# Altium PCB CH32V103C-R1-1v1.PcbDoc
Units mil, origin at the board's own origin, x right, y up, seen from the top; angles counter-clockwise.
Board outline 3733 x 2651 mil, 2 copper layers (Top Layer, Bottom Layer); 65 components, 71 nets, 311 pads, 215 vias.
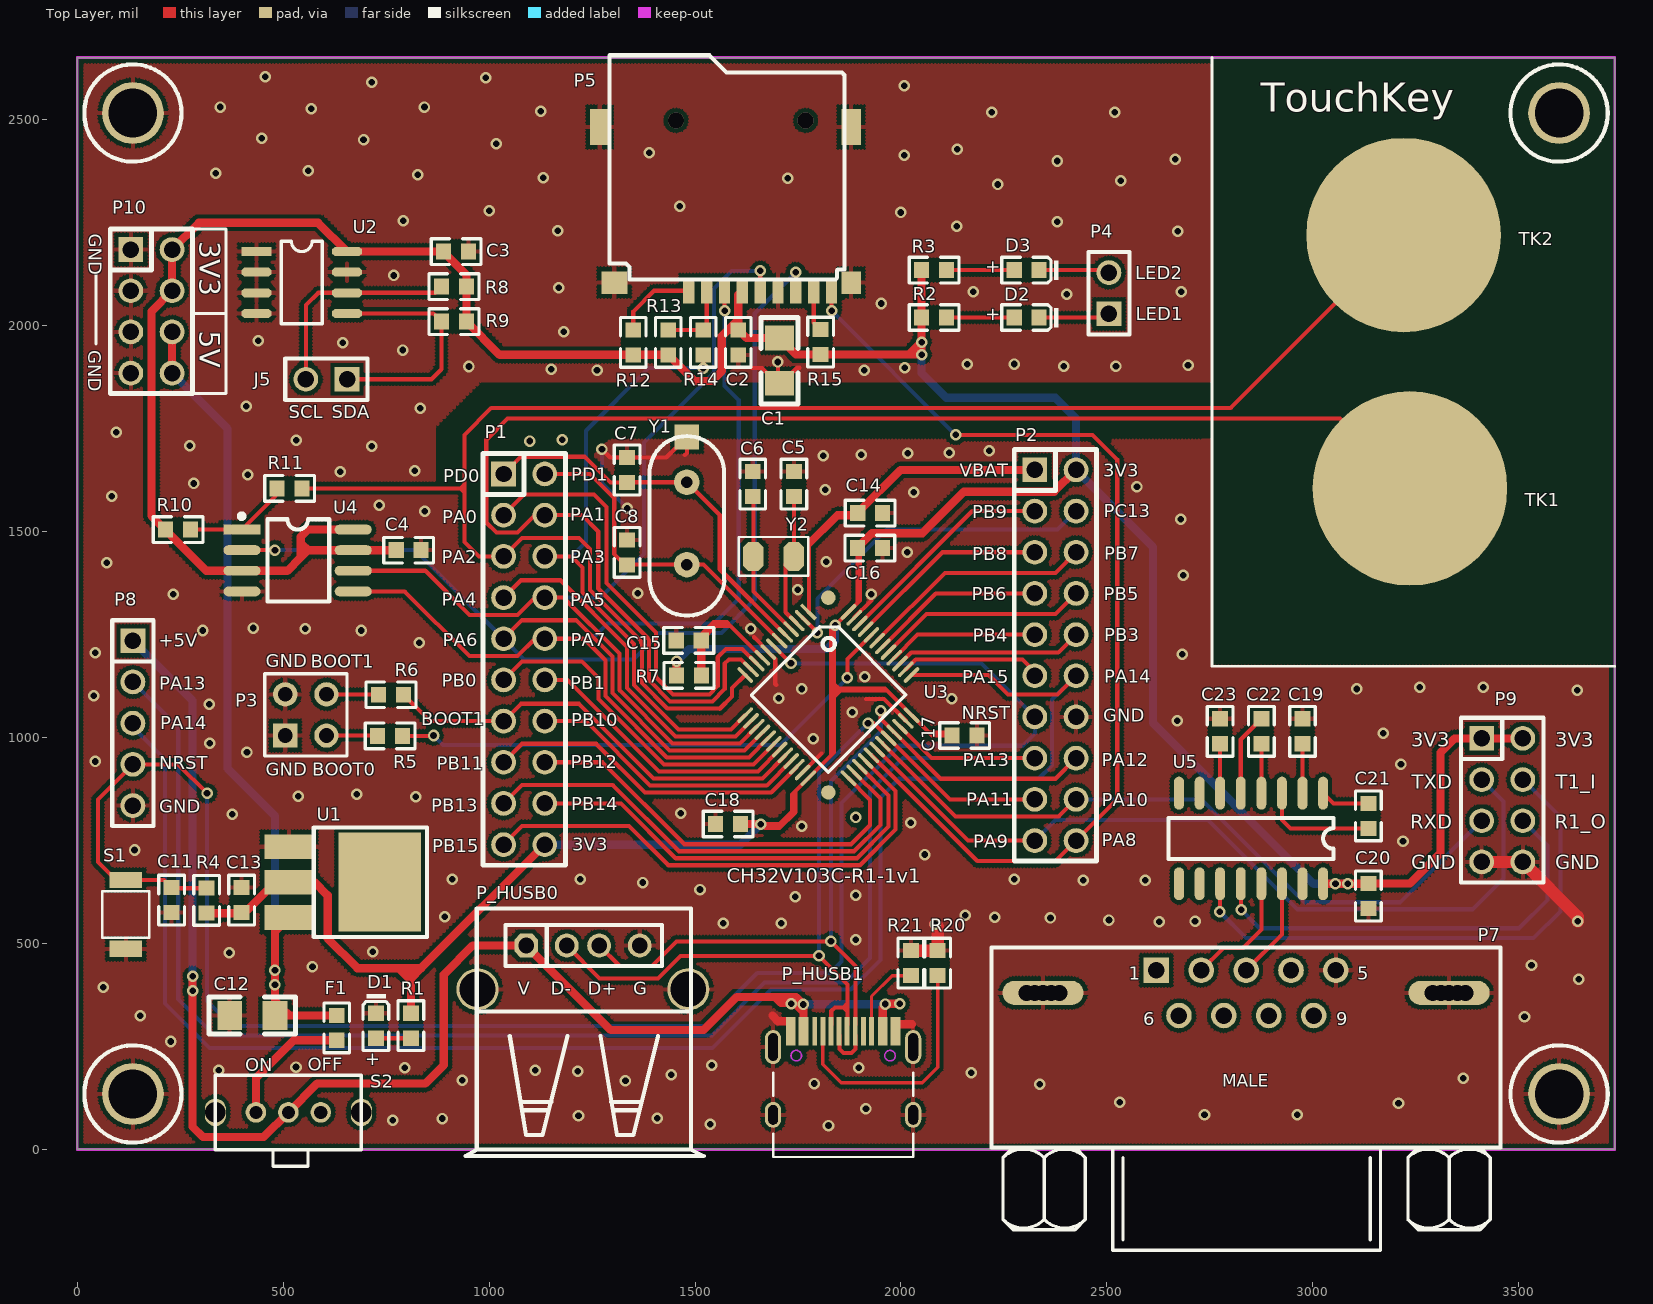
[diagram p0: Top Layer view]
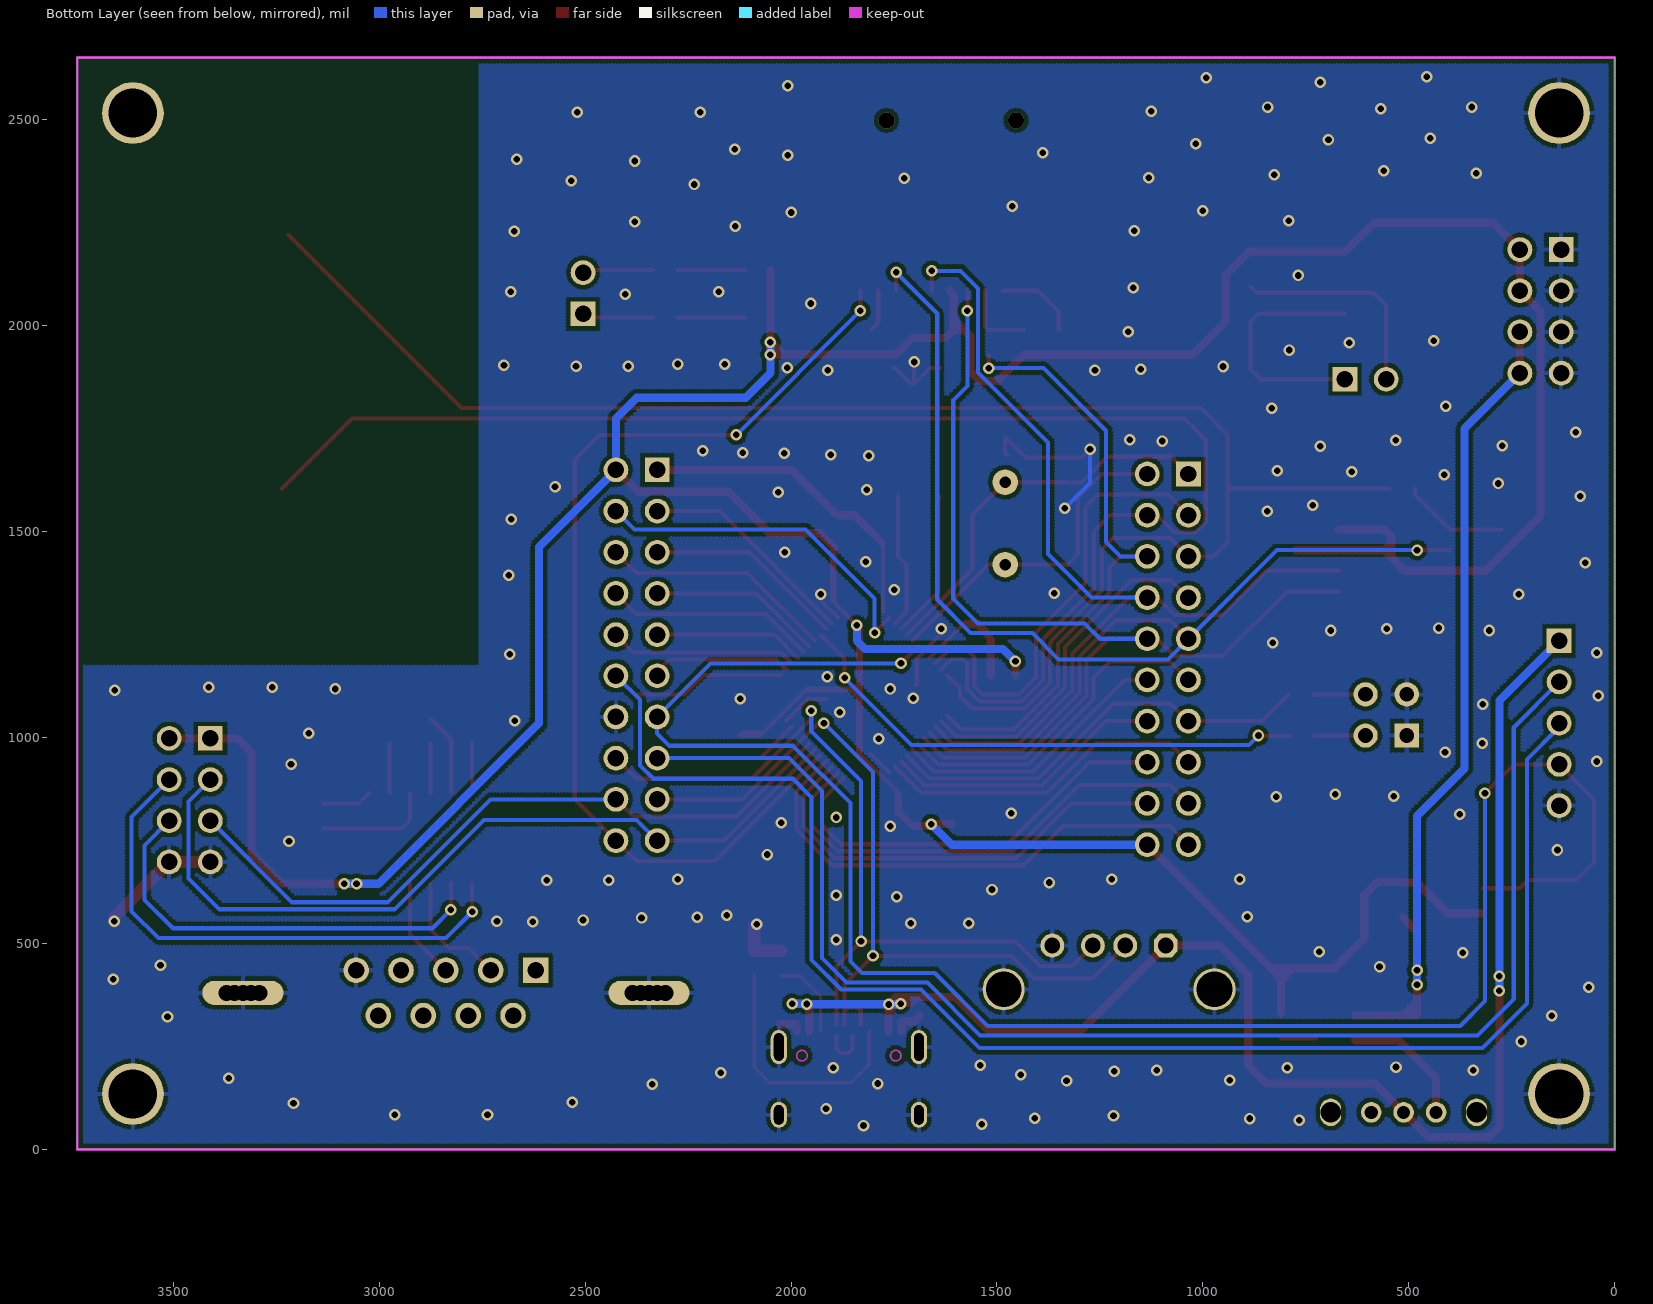
[diagram p1: Bottom Layer view, seen from below]

## Layer stack, top to bottom
Top Solder: solder mask 0.4, Solder Resist, Dk 3.5
Top Layer: signal copper 1.4
Dielectric1: dielectric 12.6, FR-4, Dk 4.8
Bottom Layer: signal copper 1.4
Bottom Solder: solder mask 0.4, Solder Resist, Dk 3.5

## Board outline
0,0 3733,0 3733,2651 0,2651

## Design rules (kind name [scope] priority, off if disabled: settings)
Clearance Clearance_1 [InPolygon] p1: gap=10 ignorepadtopadclearanceinfootprint=FALSE
Clearance [All] p2: gap=6 ignorepadtopadclearanceinfootprint=FALSE
ComponentClearance [All] p1 off: gap=10 collisioncheckmode=3 verticalgap=10 showdistances=FALSE
DiffPairsRouting [All] p1: maxlimit=10 minlimit=7 mostfreqgap=8 toplayer_minwidth=6 toplayer_maxwidth=15 toplayer_prefwidth=8 bottomlayer_minwidth=6 bottomlayer_maxwidth=15 bottomlayer_prefwidth=8 maxuncoupledlength=500
MinimumSolderMaskSliver [All] p1 off: minsoldermaskwidth=10
PolygonConnect PolygonConnect_1 [IsVia] p1: connectstyle=Direct reliefconductorwidth=10 reliefentries=4 polygonreliefangle="90 Angle" airgapwidth=10
PolygonConnect [All] p2: connectstyle=Relief reliefconductorwidth=10 reliefentries=4 polygonreliefangle="90 Angle" airgapwidth=10
RoutingVias [All] p1: holewidth=16 width=28 viastyle="Through Hole" minholewidth=12 minwidth=24 maxholewidth=28 maxwidth=50
SilkToSilkClearance [All] p1 off: silktosilkclearance=10
SilkToSolderMaskClearance [IsPad] p1 off: minsilkscreentomaskgap=10 clearancetoexposedcopper=TRUE
SolderMaskExpansion [All] p1: expansion=4 istentingtop=FALSE
Width [All] p1: maxlimit=100 minlimit=6 preferedwidth=10
25 further rules are at their usual default settings.

## Components (designator, comment, footprint, x,y, rotation, side; value= is the part's Value field where it differs from the comment)
C1 "10uF" 3216 1705,1970 r90 top value=10uF/16V
C2 "0.1uF" 0603 1605,1990 r270 top
C3 "0.1uF" 0603 950,2180 r180 top value=15pF
C4 "0.1uF" 0603 835,1455 r180 top
C5 "12pF" 0603 1740,1585 r90 top
C6 "12pF" 0603 1640,1585 r90 top
C7 "22pF" 0603 1335,1680 r270 top
C8 "22pF" 0603 1335,1480 r270 top
C11 "0.1uF" 0603 229,575 r90 top
C12 "10uF" 3216 480,325 r0 top
C13 "10uF" 0603 399,575 r90 top
C14 "0.1uF" 0603 1895,1545 r0 top value=15pF
C15 "0.1uF" 0603 1515,1236.1 r180 top value=15pF
C16 "0.1uF" 0603 1955,1460 r180 top value=15pF
C17 "0.1uF" 0603 2185,1005 r180 top value=15pF
C18 "0.1uF" 0603 1550,790 r0 top value=15pF
C19 "0.1uF" 0603 2975,985 r90 top
C20 "0.1uF" 0603 3135,585 r90 top
C21 "0.1uF" 0603 3135,840 r270 top
C22 "0.1uF" 0603 2875,985 r90 top
C23 "0.1uF" 0603 2775,985 r90 top
D1 "POWER" 0603+ 725,270 r90 top
D2 "LED1   blue" 0603+ 2275,2020 r0 top
D3 "LED2  blue" 0603+ 2275,2135 r0 top
F1 "500mA" 0603 630,265 r90 top
J5 "Header 2" SIP2-2.54mm 655,1870 r90 top
P1 "Header 10X2" IDC20-2.54mm 1035,1640 r0 top
P2 "Header 10X2" IDC20-2.54mm 2325,1650 r0 top
P3 "Header 2X2" HDR2X2 505,1005 r0 top
P4 "Header 2" SIP2-2.54mm 2505,2029 r0 top
P5 "TF_自弹" TF 1485,2085 r0 top
P7 "DB9" DB9/M 2620,435 r0 top
P8 "Header 5" SIP5-2.54mm 135,1235 r0 top
P9 "HEADER 4x2" IDC8-2.54mm 3410,998 r0 top
P10 "Header 4X2" IDC8-2.54mm 130,2185 r0 top
P_HUSB0 "USB_A" USBA-l 1090,495 r0 top
P_HUSB1 "TYPE-C" TYPE-C-Receptacle-2.0 1859.5,286.69 r0 top
R1 "1K" 0603 810,270 r90 top
R2 "1K" 0603 2050,2020 r0 top
R3 "1K" 0603 2050,2135 r0 top
R4 "10K" 0603 314,635 r270 top
R5 "10K" 0603 790,1004 r180 top
R6 "10K" 0603 792,1104 r180 top
R7 "0Ω" 0603 1455,1151.1 r0 top value=10K
R8 "10K" 0603 945,2095 r180 top
R9 "10K" 0603 945,2010 r180 top
R10 "10K" 0603 275,1505 r180 top
R11 "NC(0Ω)" 0603 485,1605 r0 top
R12 "10K" 0603 1350,1990 r270 top
R13 "10K" 0603 1435,1990 r270 top
R14 "NC(0Ω)" 0603 1520,1990 r270 top
R15 "10K" 0603 1805,1930 r90 top
R20 "NC(5.1K)" 0603 2089,422 r90 top
R21 "NC(5.1K)" 0603 2024,422 r90 top
S1 "KEY" 贴片按键 118,654 r270 top
S2 "SW" KEY2 355,90 r0 top
TK1 "KEY6" TOUCHKEY-12mm 3275,1605 r0 top
TK2 "KEY7" TOUCHKEY-12mm 3260,2220 r0 top
U1 "1117-3.3V" SOT-223 514,735 r270 top
U2 "24C02" SOP8 435,2180 r270 top
U3 "CH32V103C" LQFP48 1775,1305 r225 top
U4 "W25Q16" SOIC-8_208mil 400,1505 r0 top
U5 "MAX3232" SOIC-16_150mil 3025,865 r270 top
Y1 "8M" XT62/28 1480,1420 r0 top
Y2 "32.768k" FC-135 1740,1440 r180 top

## Footprints (in the part's own frame and the unit in brackets; to place one, negate y for a bottom-side part, rotate by r counter-clockwise, add the part's x,y. Pads: shape width x height; smd on the part's side, far side on the other; paste and mask are expansions set on the pad)
0603 [mm]
  rect 0.93x0.98 smd: 1(0,0) 2(1.54,0)
  silkscreen extent -0.76,-0.79 2.3,0.79
0603+ [mm]
  rect 0.93x0.98 smd: 1(0,0) 2(1.54,0)
  silkscreen extent -0.76,-0.79 2.72,0.79
3216 [mil]
  rect 60x70 smd: 1(0,0) 2(-110,0)
  silkscreen extent -160,-45 50,45
DB9/M [mil]
  round 39.37 hole 39.37: 0(-315,-55) 0(-295,-55) 0(-255,-55) 0(-235,-55) 0(671,-55) 0(691,-55) 0(731,-55) 0(751,-55)
  oval 196.85x59.06 hole 39.37: 0(-275,-55)
  oval 196.85x59.05 hole 39.37: 0(711,-55)
  rect 62x62 hole 40: 1(0,0)
  round 62 hole 40: 2(109,0) 3(218,0) 4(327,0) 5(436,0) 6(55,-110) 7(164,-110) 8(273,-110) 9(382,-110)
  silkscreen extent -400,-680 836,55
FC-135 [mil]
  oct 50x70 smd: 1(0,0) 2(98.43,0)
  silkscreen extent -35,-47 133,47
HDR2X2 [mm] "Connector; Header; 2x2 Position"
  rect 1.5x1.5 hole 0.9: 1(0,0)
  round 1.5 hole 0.9: 2(0,2.54) 3(2.54,0) 4(2.54,2.54)
  silkscreen extent -1.27,-1.27 3.81,3.81
IDC8-2.54mm [mil]
  rect 60x60 hole 40: 1(0,0)
  round 60 hole 40: 2(100,0) 3(0,-100) 4(100,-100) 5(0,-200) 6(100,-200) 7(0,-300) 8(100,-300)
  silkscreen extent -50,-350 150,50
IDC20-2.54mm [mil]
  rect 60x60 hole 40: 1(0,0)
  round 60 hole 40: 2(100,0) 3(0,-100) 4(100,-100) 5(0,-200) 6(100,-200) 7(0,-300) 8(100,-300) 9(0,-400) 10(100,-400) 11(0,-500) 12(100,-500) 13(0,-600) 14(100,-600) 15(0,-700) 16(100,-700) 17(0,-800) 18(100,-800) 19(0,-900) 20(100,-900)
  silkscreen extent -50,-950 150,50
KEY2 [mm]
  oval 1.3x1.7 hole 1.27: 0(-0.5,0) 0(8.5,0)
  round 1.27 hole 0.813: 1(4,0) 2(2,0) 3(6,0)
  silkscreen extent -0.51,-3.32 8.5,2.29
LQFP48 [mm]
  round 0.889 smd: 0(-1.496,0.254) 0(6.996,8.746)
  rect 0.229x1.27 smd: 1(0,0)
  oval 0.229x1.27 smd: 2(0.5,0) 3(1,0) 4(1.5,0) 5(2,0) 6(2.5,0) 7(3,0) 8(3.5,0) 9(4,0) 10(4.5,0) 11(5,0) 12(5.5,0) 25(5.5,9) 26(5,9) 27(4.5,9) 28(4,9) 29(3.5,9) 30(3,9) 31(2.5,9) 32(2,9) 33(1.5,9) 34(1,9) 35(0.5,9) 36(0,9)
  oval 1.27x0.229 smd: 13(7.25,1.75) 14(7.25,2.25) 15(7.25,2.75) 16(7.25,3.25) 17(7.25,3.75) 18(7.25,4.25) 19(7.25,4.75) 20(7.25,5.25) 21(7.25,5.75) 22(7.25,6.25) 23(7.25,6.75) 24(7.25,7.25) 37(-1.75,7.25) 38(-1.75,6.75) 39(-1.75,6.25) 40(-1.75,5.75) 41(-1.75,5.25) 42(-1.75,4.75) 43(-1.75,4.25) 44(-1.75,3.75) 45(-1.75,3.25) 46(-1.75,2.75) 47(-1.75,2.25) 48(-1.75,1.75)
  silkscreen extent -0.65,1.15 6.11,7.86
SIP2-2.54mm [mil]
  rect 60x60 hole 40: 1(0,0)
  round 60 hole 40: 2(0,100)
  silkscreen extent -50,-50 50,150
SIP5-2.54mm [mil]
  rect 60x60 hole 40: 1(0,0)
  round 60 hole 40: 2(0,-100) 3(0,-200) 4(0,-300) 5(0,-400)
  silkscreen extent -50,-450 50,50
SOIC-8_208mil [mil]
  rect 90x24 smd: 1(0,0)
  oval 90x24 smd: 2(0,-50) 3(0,-100) 4(0,-150) 5(270,-150) 6(270,-100) 7(270,-50) 8(270,0)
  silkscreen extent -7,-175 212,38
SOIC-16_150mil [mil]
  oval 80x24 smd: 1(0,0) 2(0,-50) 3(0,-100) 4(0,-150) 5(0,-200) 6(0,-250) 7(0,-300) 8(0,-350) 9(220,-350) 10(220,-300) 11(220,-250) 12(220,-200) 13(220,-150) 14(220,-100) 15(220,-50) 16(220,0)
  silkscreen extent 60,-375 160,25
SOP8 [mil]
  rect 22x72 smd: 1(0,0)
  oct 22x72 smd: 2(50,0) 3(100,0) 4(150,0) 5(150,220) 6(100,220) 7(50,220) 8(0,220)
  silkscreen extent -25,60 175,160
SOT-223 [mil]
  rect 60x120 smd: 1(0,0) 2(86,0) 3(172,0)
  rect 240x200 smd: ""(86,220)
  silkscreen extent -47,60 219,335
TF [mm]
  rect 0.7x1.6 smd: 1(0,0) 2(1.1,0) 3(2.2,0) 4(3.3,0) 5(4.4,0) 6(5.5,0) 7(6.6,0) 8(7.7,0) 9(8.8,0)
  rect 1.2x2.2 smd: 10(-5.5,10.1) 10(10,10.1)
  rect 1.6x1.4 smd: 10(-4.6,0.5)
  rect 1.2x1.4 smd: 10(10,0.5)
  silkscreen extent -4.9,0.7 9.59,14.52
TOUCHKEY-12mm [mm]
  round 12 smd: 1(-1,0)
TYPE-C-Receptacle-2.0 [mm]
  oval 1x1.6 hole 0.6 slot 1.2 at 90 deg: 0(-4.32,-5.15) 0(4.32,-5.15)
  oval 1x2.1 hole 0.6 slot 1.7 at 90 deg: 0(-4.32,-0.97) 0(4.32,-0.97)
  rect 0.6x1.75 smd: A1(-3.225,0) A4(-2.45,0) B1(3.225,0) B4(2.45,0)
  rect 0.3x1.75 smd: A5(-1.25,0) A6(-0.25,0) A7(0.25,0) A8(1.25,0) B5(1.75,0) B6(0.75,0) B7(-0.75,0) B8(-1.75,0)
  Keep-Out Layer circle w0.1: c2.89,-1.5 r0.325
  Keep-Out Layer circle w0.1: c-2.89,-1.5 r0.325
  silkscreen extent -4.32,-7.75 4.32,-2.55
USBA-l [mm]
  round 2.6 hole 2.2: 0(-3,-2.7) 0(10,-2.7)
  oct 1.473x1.473 hole 0.965: 1(0,0)
  round 1.473 hole 0.965: 2(2.5,0) 3(4.5,0) 4(7,0)
  silkscreen extent -3.75,-12.99 10.95,2.29
XT62/28 [mil]
  rect 60x60 smd: 0(0,310)
  round 62 hole 28: 1(0,0) 2(0,200)
  silkscreen extent -91,-124 91,312
贴片按键 [mm]
  rect 1x2 smd: 1(0,0) 3(4.242,0)
  silkscreen extent 0.69,-1.45 3.55,1.45

## Part data
C1: library part ELECTRO1, "Electrolytic Capacitor"
C2 C3 C5 C6 C7 C8 C11 C14 C15 C16 C17 C18: library part Cap, "Capacitor", Published=8-Jun-2000, Publisher="Altium Limited"
  C2: Revision="July-2002: Re-released for DXP Platform."
  C3 C5 C6 C7 C8 C11 C14 C15 C16 C17 C18: LatestRevisionDate=17-Jul-2002, LatestRevisionNote="Re-released for DXP Platform.", PackageReference=RAD-0.3
C4 C12 C13 C19 C20 C21 C22 C23: library part CAP, "Capacitor"
D1 D2 D3: library part LED0, "Typical INFRARED GaAs LED", LatestRevisionDate=08-Jul-2005, LatestRevisionNote="Mech Layer 1 removed.", PackageReference=LED-0, Published=8-Jun-2000, Publisher="Altium Limited"
F1: library part FUSE1, "Fuse"
J5 P4 P8: library part 2HEAD
P1 P2: "Header, 10-Pin, Dual row", LatestRevisionDate=17-Jul-2002, LatestRevisionNote="Re-released for DXP Platform.", Publisher="Altium Limited"
P3: "Header, 2-Pin, Dual row", LatestRevisionDate=17-Jul-2002, LatestRevisionNote="Re-released for DXP Platform.", Publisher="Altium Limited"
P9 P10: "Header, 4-Pin, Dual row"
  P10: LatestRevisionDate=17-Jul-2002, LatestRevisionNote="Re-released for DXP Platform.", Publisher="Altium Limited"
P_HUSB0: library part USB, "USB Port"
P_HUSB1: library part TYPE-C1
R1 R2 R3: library part "Res Semi", "Semiconductor Resistor", LatestRevisionDate=17-Jul-2002, LatestRevisionNote="Re-released for DXP Platform.", PackageReference=AXIAL-0.5, Published=8-Jun-2000, Publisher="Altium Limited"
R4 R5 R6 R7 R8 R9 R20 R21: library part Res2, "Resistor"
  R4 R5 R6 R7 R8 R9: LatestRevisionDate=17-Jul-2002, LatestRevisionNote="Re-released for DXP Platform.", PackageReference=AXIAL-0.4, Published=8-Jun-2000, Publisher="Altium Limited"
R10 R13: library part DZ
R11 R12 R14 R15: library part RES2
TK1 TK2: library part KEY
U2: library part 24C256
U3: "RISC-V MCU with USB device & USB host & ADC & Touch Key"
U4: library part Pro89C.tmp_25F512_2
U5: library part MAX232CPE(16), "+-15KV ESD-PROTECTED, +5V RS-232 TRANSCEIVERS"
Y1 Y2: library part XTAL, "Crystal Oscillator", LatestRevisionDate=17-Jul-2002, LatestRevisionNote="Re-released for DXP Platform.", PackageReference=R38, Published=8-Jun-2000, Publisher="Altium Limited"

## Free pads (board coordinates)
  round 150 hole 118.11: 0(135,134.61) 0(135,2516.39) 0(3598,134.61) 0(3598,2516.39)

## Via types
v1: diameter 28, hole 16, Top Layer to Bottom Layer, tented both sides, 213 vias
v2: diameter 39.37, hole 39.37, Top Layer to Bottom Layer, 2 vias

## Nets (pads, with @x,y where several pads share a name; then routed paths per layer and width w, separated by ;. In a path a pad name is that pad's centre, name@x,y a point inside that pad or via, vN(x,y) a via of type N, cw(c..) or ccw(c..) an arc to the next point about the centre after c; other vN are vias at no path point)
3V3: C1.1 C2.1 C3.2 C4.2 C13.1 C16.2 C17.2 C18.2 C20.2 P1.20 P2.2 P5.4 P9.1 P9.2 P10.2 P10.4 R1.2 R2.1 R3.1 R4.2 R7.1 R8.1 R9.1 R10.2 R12.2 R13.2 R15.1 U1.2 U2.8 U3.24 U3.36 U3.48 U4.3 U4.7 U4.8 U5.16 | length 11888.1
  Top Layer w10: 1743.66,870 U3.24 1830,956.34 ; 1743.66,870 1735,861.34 1735,820 1705,790 v1(1660,790) 1670,780 1705,780 1743.66,818.66 1743.66,870 ; 1830,956.34 1830,1100 ; 1830,956.34 1837.5,963.84 1837.5,1098 ; 1830,1100 1830,1115 ; 1830,1100 1837.5,1107.5 ; 1830,1115 1830,1130 ; 1830,1115 1845,1115 ; 1830,1130 1837.5,1122.5 ; 1830,1130 1830,1138 ; 1830,1138 1837.5,1130.5 ; 1830,1138 1830,1262.56 v1@1837.5,1270.06 ; 1837.5,1098 1837.5,1107.5 ; 1837.5,1098 1854.5,1115 ; 1837.5,1107.5 1845,1115 ; 1837.5,1122.5 1845,1115 ; 1837.5,1122.5 1837.5,1126.5 ; 1837.5,1126.5 1849,1115 ; 1837.5,1126.5 1837.5,1130.5 ; 1837.5,1130.5 1849,1119 ; 1837.5,1130.5 v1@1837.5,1270.06 ; v1@1837.5,1270.06 v1(1840,1272.56) U3.48 1894.37,1326.93 ; 1845,1115 1849,1115 ; 1849,1115 1849,1119 ; 1849,1115 1854.5,1115 ; 1849,1119 1858.5,1119 ; 1854.5,1115 1858.5,1119 ; 1854.5,1115 1965,1115 ; 1858.5,1119 1961,1119 1965,1115 ; 1894.37,1326.93 1900,1332.56 1900,1454.37 C16.2 1894.37,1326.93 ; 1965,1115 U3.36 2067.5,1012.5 ; 2067.5,1012.5 2075,1005 C17.2 2116.87,1012.5 2067.5,1012.5
  Top Layer w20: R10.2 R10.2@214.37,1503.99 ; R4.2@320,573.37 404.37,573.37 405,574 406.01,574 480.01,648 U1.2@520,648 ; U1.2 576,649 608,617 608,512 680,440 780,440 ; U4.8 560,1505 542.5,1487.5 542.5,1470 ; C4.2 U4.7 560,1455 ; R1.2 810,410 ; P1.20 835,440 ; R7.1 v1(1455,1185) ; C18.2 v1(1660,790) ; P5.4 1605,2075.08 1605,2015 ; C16.2 1894.37,1461.01 1929.65,1496.29 2052,1496.29 2152.71,1597 2372,1597 P2.2 ; R3.1 R2.1 v1(2050,1960) ; U5.16 v1(3055,645) v1(3085,645) 3134.37,645 C20.2 3236,645.63 3310,719.63 3310,964 3344,998 P9.1 P9.2 ; R10.2@214.37,1503.99 180,1538.36 180,2035 P10.4 P10.2 295,2250 585,2250 U2.8 C3.2 889.37,2178.99 945,2123.36 R8.1 R9.1 1025.63,1929.37 R12.2 R13.2 1498.37,1866 1541,1866 1565,1890 1565,1975 1580,1990 ; R10.2@214.37,1503.99 313.36,1405 U4.3 510,1405 542.5,1437.5 ; 542.5,1437.5 542.5,1450 ; 542.5,1437.5 560,1455 ; 542.5,1450 542.5,1470 ; 542.5,1450 547.5,1455 560,1455 ; 542.5,1470 545,1470 560,1455 ; 780,440 810,440 ; 780,440 810,410 ; 810,410 810,415 ; 810,415 810,440 ; 810,415 835,440 ; 810,440 835,440 ; 1580,1990 1605,2015 ; 1580,1990 C2.1 ; C2.1 1605,2015 ; C2.1 1625,1970 C1.1 1745,1930 R15.1 2020,1930 ; 2020,1930 v1(2050,1960) ; 2020,1930 v1(2050,1930) v1(2050,1960)
  Bottom Layer w20: P1.20 1610,740 v1(1660,790) ; v1(1455,1185) 1485,1215 1820,1215 1840,1235 v1(1840,1272.56) ; v1(2050,1960) v1(2050,1930) 2050,1885 2110,1825 2375,1825 2425,1775 P2.2 2612,1463 2612,1035 3002,645 v1(3055,645) v1(3085,645)
5V: C12.1 F1.2 P10.6 P10.8 U1.3 | length 2165.1
  Top Layer w20: P10.8 P10.6 ; U1.3 480,529 v1(480,435) v1(480,400) 480,360 ; F1.2 629.37,325 515,325 ; C12.1 C12.1@497.5,342.5 ; C12.1 480,360 ; C12.1 515,325 ; 480,360 C12.1@497.5,342.5 ; C12.1@497.5,342.5 515,325
  Bottom Layer w20: P10.8 365,1750 365,925 480,810 v1(480,435) v1(480,400)
+5V: P8.1 P_HUSB0.1 P_HUSB1.A4 P_HUSB1.B4 S2.1 | length 3750.1
  Top Layer w20: v1(280,420) v1(280,385) 280,55 305,30 452.48,30 S2.1 582.48,160 845,160 890,205 890,425 960,495 P_HUSB0.1 1295,290 1521,290 1601,370 1694,370 ; v1@1746,352 1746,351.04 1763.04,334 ; P_HUSB1.A4 1763.04,334 ; P_HUSB1.B4 1955.96,344.79 1962,350.84 v1(1962,353) 1962.5,353.5 1996.5,353.5 v1(1997,354) ; 1694,370 1745,370 v1@1762.02,352.98 ; 1694,370 1708.47,355.53 1732.47,355.53 v1(1734,354) 1735.02,352.98 v1@1762.02,352.98 ; v1@1762.02,352.98 v1(1763.04,351.96) 1763.04,334
  Bottom Layer w20: P8.1 280,1090 v1(280,420) v1(280,385) ; v1(1734,354) 1735.52,352.48 v1@1763.57,352.48 ; v1(1763.04,351.96) v1@1763.57,352.48 ; v1(1997,354) 1996.5,353.5 1962.5,353.5 v1(1962,353) 1961.48,352.48 v1@1763.57,352.48
BOOT0: R5.1 U3.44 | length 1285.9
  Top Layer w10: R5.1 864,1004 v1(865,1005) ; v1(1870,1145) 1870,1191.21 U3.44
  Bottom Layer w10: v1(865,1005) 888,982 1707,982 v1(1870,1145)
BOOT1: P1.13 R6.1 U3.20 | length 1069.4
  Top Layer w10: R6.1 856,1040 P1.13 1077,1082 1218,1082 1399,901 1663.31,901 U3.20
GND: C1.2 C2.2 C3.1 C4.1 C5.2 C6.2 C7.1 C8.1 C11.1 C12.2 C13.2 C14.2 C15.2 C16.1 C17.1 C18.1 C19.2 C20.1 C23.2 D1.2 P2.14 P3.1 P3.2 P5.6 P5.10 P7.0 P7.5 P8.5 P9.7 P9.8 P10.1 P10.3 P10.5 P10.7 P_HUSB0.0 P_HUSB0.4 P_HUSB1.0 P_HUSB1.A1 P_HUSB1.B1 pad.0@135,134.61 pad.0@135,2516.39 pad.0@3598,134.61 R20.2 R21.2 S1.3 U1.1 U2.1 U2.2 U2.3 U2.4 U2.7 U3.8 U3.23 U3.35 U3.47 U4.4 U5.15 Y1.0 | length 1607.4
  Top Layer w10: v1(1274,1700) 1294,1680 C7.1 1430,1680 Y1.0 1480,1691 1475,1686 ; 1638.29,1897.06 1662.94,1897.06 1700,1860 C1.2 ; 1643,1243.99 1677.56,1209.42 U3.8 1694.64,1190.49 1694.64,1130.36 1697,1128 ; v1(1701,1912) 1701,1864 C1.2 ; 1754,1898 1748,1898 1710,1860 C1.2 ; U3.23 1806.89,961.07 ; U3.47 1928,1332.73 v1(1928,1348) ; 1915,1094 1958.77,1094 2011.63,1041.14 U3.35
  Top Layer w20: 1688,325 1701.86,311.14 1730.72,311.14 1732.53,309.33 P_HUSB1.A1 ; P_HUSB1.B1 1986.47,301.93 1988.28,303.74 2027,303.74
  Top Layer w30: R21.2 R20.2 2089,541 v1(2083,547) ; P9.7 P9.8 3643,565 v1(3643,554)
  Bottom Layer w10: v1(1274,1700) 1274,1618 v1(1335,1557)
  other v1: 1824,58 1537,61 766,71 886,75 1408,76 1217,82 2737,84 2962,84 1915,99 3208,112 2531,115 2337,158 1789,160 1331,167 935,168 3365,173 1442,181 2171,186 1215,190 343,192 1112,192 795,198 1897,198 531,200 1541,204 227,262 3514,322 153,325 63,394 3646,413 571,444 3531,447 369,478 717,480 1890,509 1568,549 1709,549 2627,553 2714,554 2505,557 2363,562 2228,564 892,565 2156,569 1743,613 1890,617 1512,631 1373,648 2443,654 2593,654 910,656 1221,656 2275,656 2058,716 139,727 3219,748 1759,785 2024,793 376,814 1465,816 822,856 536,858 679,862 3214,935 44,942 412,964 322,986 1787,997 3171,1010 2671,1041 1882,1061 320,1081 2123,1094 1703,1095 40,1102 3642,1115 1759,1118 3107,1118 3260,1122 3414,1122 1912,1148 2683,1202 44,1206 830,1230 305,1260 689,1260 553,1264 1635,1264.05 427,1266 233,1348 1361,1350 1749,1359 2685,1394 72,1424 1819,1427 2015.36,1450 2679,1530 844,1550 733,1564 84,1586 2031,1596 1816,1602 2573,1609 283,1617 414,1638 638,1645 819,1648 1811,1684 1904,1687 2016,1690 2117,1692 2214,1696 715,1707 273,1709 1099,1720 532,1722 1178,1723 95,1741 833,1800 410,1804 1262,1892 1911,1892 1151,1894 2009,1898 951,1901 2395,1902 2522,1902 2697,1904 2161,1906 2275,1907 790,1941 645,1959 439,1964 1181,1985 1952,2054 2403,2076 2175,2083 2681,2083 1169,2092 768,2122 2672,2229 1167,2231 2135,2242 2379,2252 791,2255 1999,2275 1000,2279 1463,2290 2235,2343 2534,2352 1725,2358 1131,2359 827,2367 336,2370 561,2376 2379,2400 2666,2404 2008,2414 1389,2420 2137,2429 1017,2442 695,2452 448,2455 2220,2518 2519,2518 1125,2521 568,2527 347,2531 843,2531 2008,2583 715,2591 992,2602 456,2605
IIC_SCL: J5.2 R8.2 U2.6 | length 528
  Top Layer w10: J5.2 555,2050 585,2080 U2.6 869.37,2080 R8.2
IIC_SDA: J5.1 R9.2 U2.5 | length 592.7
  Top Layer w10: J5.1 860,1870 884.37,1894.37 R9.2 864.37,2030 U2.5
LED1: D2.2 P4.1 | length 173.1
  Top Layer w10: D2.2 2496,2020 P4.1
LED2: D3.2 P4.2 | length 171.9
  Top Layer w10: D3.2 2499,2135 P4.2
NetC19_1: C19.1 U5.2 | length 120
  Top Layer w10: U5.2 C19.1
NetC21_1: C21.1 U5.1 | length 120.4
  Top Layer w10: U5.1 3050,840 C21.1
NetC21_2: C21.2 U5.3 | length 283.5
  Top Layer w10: U5.3 2925,800 2945.63,779.37 C21.2
NetC22_1: C22.1 U5.4 | length 120
  Top Layer w10: U5.4 C22.1
NetC22_2: C22.2 U5.5 | length 201.3
  Top Layer w10: U5.5 2825,995.63 C22.2
NetC23_1: C23.1 U5.6 | length 120
  Top Layer w10: U5.6 C23.1
NetD1_1: D1.1 R1.1 | length 85
  Top Layer w10: D1.1 R1.1
NetD2_1: D2.1 R2.2 | length 164.4
  Top Layer w10: R2.2 D2.1
NetD3_1: D3.1 R3.2 | length 164.4
  Top Layer w10: R3.2 D3.1
NetF1_1: F1.1 S2.2 | length 317.8
  Top Layer w20: S2.2 433.74,173.74 525,265 F1.1
NetP3_3: P3.3 R5.2 | length 124.8
  Top Layer w10: P3.3 728.37,1005 R5.2
NetP3_4: P3.4 R6.2 | length 126.8
  Top Layer w10: P3.4 730.37,1105 R6.2
NetP5_1: P5.1 R12.1 | length 200.7
  Top Layer w10: R12.1 1350,2035 1400,2085 P5.1
NetP5_2: P5.2 R13.1 R14.1 | length 183.4
  Top Layer w10: R13.1 R14.1 1528.31,1998.31 P5.2
NetP5_8: P5.8 R15.2 | length 101.3
  Top Layer w10: P5.8 1788.15,2007.48 R15.2
NetP_HUSB1_A5: P_HUSB1.A5 R20.1 | length 615.5
  Top Layer w8: P_HUSB1.A5 1810.29,206.71 1855,162 2052,162 2089,199 R20.1
NetP_HUSB1_B5: P_HUSB1.B5 R21.1 | length 201.3
  Top Layer w8: P_HUSB1.B5 1928.4,371.4 1979,422 R21.1
NetR10_1: R10.1 R11.1 U4.1 | length 260.2
  Top Layer w10: R10.1 U4.1 485,1590 R11.1
NRST: C11.2 P2.13 P8.4 R4.1 S1.1 U3.7 | length 4575.3
  Top Layer w10: C11.2 210.63,654 S1.1 94,654 50,698 50,850 P8.4 245,935 v1(315,865) ; C11.2@235,634.63 235.63,634 R4.1@320,634 ; U3.7 v1(1732.97,1180)
  Bottom Layer w10: v1(315,865) 315,360 375,300 1523,300 1651,428 1828,428 1856,456 1856,841 1995,980 2295,980 2325,1010 P2.13 2195,1180 v1(1732.97,1180)
PA0: P1.3 U3.10 | length 1109.4
  Top Layer w10: P1.3 1085,1590 1255,1590 1285,1560 1285,1375 1405,1255 1405,1146.53 1446.53,1105 1535,1105 1555,1125 1555,1195 1575,1215 1614.45,1215 U3.10
PA1: P1.4 TK1.1 U3.11 | length 3623.2
  Top Layer w10: 1390,1137.49 1388,1139.49 ; U3.11 1611.61,1190 1582,1190 1572,1180 1572,1117.96 1542.04,1088 1439.49,1088 1388,1139.49 ; TK1.1 3065.63,1775 1045,1775 993,1723 993,1522.6 1017.6,1498 1068.96,1498 1110.96,1540 P1.4 1225,1540 1265,1500 1265,1362.12 1386,1241.12 1386,1239 1388,1237 1388,1139.49
PA2: P1.5 R11.2 TK2.1 U3.12 | length 4217.1
  Top Layer w10: R11.2 930,1605 ; 1373.45,1130 1371,1132.45 ; U3.12 1590,1120 1590,1100 1560,1070 1559,1071 1432.45,1071 1371,1132.45 ; TK2.1 2800.63,1800 1005,1800 940,1735 940,1615 ; 930,1605 940,1595 ; 930,1605 940,1605 ; 930,1605 940,1615 ; 940,1595 940,1475 975,1440 P1.5 1080,1485 1218,1485 1245,1458 1245,1358.08 1369,1234.08 1369,1231 1371,1229 1371,1132.45 ; 940,1595 940,1605 ; 940,1605 940,1615
PA3: P1.6 R14.2 U3.13 | length 1534
  Top Layer w10: P1.6 1200,1440 1227,1413 1227,1352.04 1352,1227.04 1352,1127.41 1459.41,1020 1587.44,1020 U3.13 ; v1(1520,1897) R14.2
  Bottom Layer w10: P1.6 1200,1440 1235,1475 1235,1745 1387,1897 v1(1520,1897)
PA4: P1.7 U3.14 | length 849.1
  Top Layer w10: P1.7 1077,1382 1173,1382 1335,1220 1335,1120.37 1452.37,1003 1598.27,1003 U3.14
PA5: P1.8 P5.5 U3.15 U4.6 | length 2435.4
  Top Layer w10: U4.6 845,1405 952,1298 1068.96,1298 1110.96,1340 P1.8 1180,1340 1316.33,1203.67 1316.33,1115 1445.33,986 1609.11,986 U3.15 ; P5.5 v1(1658.23,2133.23)
  Bottom Layer w10: P1.8 1270,1340 1376,1446 1376,1716.23 1546,1886.23 1546,1907.77 1545.61,1908.16 1545.61,2090.61 1588.23,2133.23 v1(1658.23,2133.23)
PA6: P1.9 P5.7 U3.16 U4.2 | length 3144.1
  Top Layer w10: U4.2 v1(480,1455) ; P1.9 1080,1285 1210.96,1285 1299.33,1196.63 1299.33,1107.96 1438.28,969 1619.95,969 U3.16 ; P5.7 v1(1744.84,2129.84)
  Bottom Layer w10: v1(480,1455) 820,1455 P1.9 1085,1190 1350,1190 1414,1254 1564,1254 1645,1335 1645,2030 v1(1744.84,2129.84)
PA7: P1.10 P5.3 U3.17 U4.5 | length 2552.9
  Top Layer w10: U4.5 795,1355 952,1198 1068.96,1198 1110.96,1240 P1.10 1230,1240 1282.33,1187.67 1282.33,1100.92 1431.24,952 1630.79,952 U3.17 ; v1(1571.61,2036.61) P5.3
  Bottom Layer w10: P1.10 1250,1240 1287,1277 1546,1277 1606,1337 1606,1819.61 1571.61,1854 v1(1571.61,2036.61)
PA8: P2.20 P5.9 U3.29 | length 2482.3
  Top Layer w10: v1(1831.46,2036.46) P5.9 ; U3.29 2185.13,700 2375,700 P2.20 2525,850 2525,1675 2465,1735 v1(2132.91,1735)
  Bottom Layer w10: v1(1831.46,2036.46) v1(2132.91,1735)
PA9: P2.19 P9.3 U3.30 | length 2016.1
  Top Layer w10: U3.30 2162.97,750 P2.19
  Bottom Layer w10: P2.19 2375,800 2746,800 2963,583 3388,583 3463,658 3463,845 P9.3
PA10: P2.18 P9.5 U3.31 | length 1730.3
  Top Layer w10: U3.31 2132.81,808 2383,808 P2.18
  Bottom Layer w10: P2.18 2730,850 2980,600 3212,600 P9.5
PA11: P2.17 P_HUSB0.2 P_HUSB1.A7 P_HUSB1.B7 U3.32 | length 2058.9
  Top Layer w10: P_HUSB0.2 1268.43,415 1410,415 1465,470 v1(1800.96,470) 1870.12,400.84 1870.12,355 ; P_HUSB1.B7@1830.75,303.15 1830.75,335.75 1840,345 1860.12,345 ; 1865,345 1860.12,345 ; P_HUSB1.A7@1870.12,303.15 1870.12,335 ; v1(1920,1035) 1933.64,1035 U3.32 2118.64,850 P2.17 ; 1860.12,345 1870.12,335 ; 1860.12,345 1870.12,355 ; 1870.12,335 1870.12,355
  Bottom Layer w10: v1(1800.96,470) 1800.96,915.96 v1(1920,1035)
PA12: P2.16 P_HUSB0.3 P_HUSB1.A6 P_HUSB1.B6 U3.33 | length 2134
  Top Layer w10: P_HUSB0.3 1317.17,445 1395,445 1455,505 v1(1830,505) 1889.8,445.2 P_HUSB1.B6@1889.8,303.15 ; P_HUSB1.A6@1850.43,277.15 1850.43,243.57 1860,234 1880,234 1889.8,243.8 P_HUSB1.B6@1889.8,277.15 ; v1(1951,1065) 1951,1045.48 U3.33 2096.48,900 2375,900 P2.16
  Bottom Layer w10: v1(1830,505) 1830,895 1951,1016 v1(1951,1065)
PA13: P2.15 P8.2 U3.34 | length 3807
  Top Layer w10: U3.34 2074.32,950 P2.15
  Bottom Layer w10: P8.2 245,1025 245,365 333,277 1541,277 1669,405 1865,405 1925,465 1925,870 2005,950 P2.15
PA14: P2.12 P8.3 U3.37 | length 4106.8
  Top Layer w10: U3.37 2213.11,1151.89 2260,1105 2380,1105 P2.12
  Bottom Layer w10: P8.3 135,1025 213,947 213,354 321,246 1542,246 1684,388 1878,388 1950,460 1950,855 1995,900 2334.4,900 2367,932.6 2367,1092 P2.12
PA15: P2.11 U3.38 | length 345.8
  Top Layer w10: U3.38 2035.82,1190 2295,1190 2325,1160 P2.11
PB0: P1.11 U3.18 | length 829.1
  Top Layer w10: P1.11 1080,1185 1225,1185 1265.33,1144.67 1265.33,1093.88 1424.2,935 1641.63,935 U3.18
PB1: P1.12 U3.19 | length 684.3
  Top Layer w10: P1.12 1190,1140 1412,918 1652.47,918 U3.19
PB3: P2.10 U3.39 | length 456.4
  Top Layer w10: U3.39 2024.99,1207 2382,1207 P2.10
PB4: P2.9 U3.40 | length 364.6
  Top Layer w10: U3.40 2040.15,1250 P2.9
PB5: P2.8 U3.41 | length 514.1
  Top Layer w10: U3.41 2062.31,1300 2375,1300 P2.8
PB6: P2.7 U3.42 | length 422.3
  Top Layer w10: U3.42 2084.47,1350 P2.7
PB7: P2.6 U3.43 | length 571.9
  Top Layer w10: U3.43 2106.63,1400 2375,1400 P2.6
PB8: P2.5 U3.45 | length 488.2
  Top Layer w10: U3.45 2100.95,1450 P2.5
PB9: P2.3 U3.46 | length 537.7
  Top Layer w10: U3.46 2173.11,1550 P2.3
PB10: P1.14 U3.21 | length 687.3
  Top Layer w10: P1.14 1235,1040 1391,884 1674.15,884 U3.21
PB11: P1.15 U3.22 | length 805.4
  Top Layer w10: P1.15 1080,985 1260,985 1378,867 1684.99,867 U3.22
PB12: P1.16 U3.25 | length 1027.5
  Top Layer w10: P1.16 1275,940 1474,741 1878.88,741 1925,787.12 1925,848.77 U3.25
PB13: P1.17 U3.26 | length 1180.4
  Top Layer w10: P1.17 1080,885 1300,885 1461,724 1885.92,724 1950,788.08 1950,851.61 U3.26
PB14: P1.18 U3.27 | length 1096
  Top Layer w10: P1.18 1320,840 1453,707 1892.96,707 1970,784.04 1970,859.45 U3.27
PB15: P1.19 U3.28 | length 1242.3
  Top Layer w10: P1.19 1080,785 1340,785 1435,690 1900,690 1987,777 1987,870.29 U3.28
PC13: P2.4 U3.2 | length 849.2
  Top Layer w10: U3.2 v1(1797.16,1255)
  Bottom Layer w10: v1(1797.16,1255) 1797.16,1337.16 1965,1505 2380,1505 P2.4
PC14: C5.1 U3.3 Y2.1 | length 327.4
  Top Layer w10: C5.1 Y2.1 1720,1420 1720,1304.32 U3.3
PC15: C6.1 U3.4 Y2.2 | length 360.4
  Top Layer w10: C6.1 1641.57,1583.43 Y2.2 1641.57,1354.91 U3.4
PD0: C7.2 P1.1 U3.5 Y1.2 | length 969.3
  Top Layer w10: P1.1 1077,1682 1232,1682 1294.63,1619.37 C7.2@1325,1619.37 ; U3.5 1560,1408.64 1560,1540 Y1.2 C7.2@1334.37,1620 ; C7.2@1325,1619.37 C7.2 C7.2@1334.37,1620 ; C7.2@1325,1619.37 1325.63,1620 C7.2@1334.37,1620
PD1: C8.2 P1.2 U3.6 Y1.1 | length 818
  Top Layer w10: P1.2 1245,1640 1303.71,1581.29 1303.71,1445.66 1330,1419.37 1330.63,1420 Y1.1 1520.81,1420 U3.6
R1_OUT: P9.6 U5.12 | length 1071.5
  Top Layer w10: U5.12 2825.5,644.5 2825.5,582.5 v1(2826,582)
  Bottom Layer w10: v1(2826,582) 2871,537 3501,537 3570,606 3570,738 P9.6
RXD232: P7.3 U5.14 | length 246
  Top Layer w10: P7.3 2925,522 U5.14
T1_IN: P9.4 U5.11 | length 1306.5
  Top Layer w10: v1(2774,577) 2774.5,577.5 2774.5,644.5 U5.11
  Bottom Layer w10: v1(2774,577) 2838,513 3536,513 3601,578 3601,807 P9.4
TXD232: P7.2 U5.13 | length 298
  Top Layer w10: P7.2 2783,489 2830,489 2875,534 U5.13
VBAT: C14.1 P2.1 U3.1 | length 944.2
  Top Layer w10: U3.1 1777,1307 1777,1465 ; 1777,1465 1777,1477 1845,1545 C14.1 1885,1535 1847,1535 1777,1465
  Top Layer w20: C14.1 1895,1546.01 1998.99,1650 P2.1
VDDA: C15.1 R7.2 U3.9 | length 385.6
  Top Layer w10: 1550,1275 1550,1271.1 ; U3.9 1592.29,1265 1586.19,1271.1 ; 1550,1271.1 1586.19,1271.1 ; 1550,1271.1 C15.1 1515,1250 1545,1280 1577.29,1280 1586.19,1271.1
  Top Layer w20: C15.1 1515,1151.73 R7.2
pads on no net: P7.1 P7.4 P7.6 P7.7 P7.8 P7.9 P_HUSB1.A8 P_HUSB1.B8 S2.0 S2.3 U1. U3.0 U5.7 U5.8 U5.9 U5.10
copper on no net:
  other v1: 1890,806
  other v2: 1453.5,2498.39 1768.47,2498.39

## Polygon pours and split planes (outlines as drawn)
GND on Top Layer "BOTTOM-No Net" (hatched 90Degree grid 8 track 8, remove dead copper, pour order 6): 0,2651 3733,2651 3733,0 0,0
GND on Bottom Layer "BOTTOM-No Net" (hatched 90Degree grid 8 track 8, remove dead copper, pour order 8): 0,2651 3749.78,2651 3733,0 3593,0 0,0

## Keep-outs
Keep-Out Layer:
  the board outline again, w7

## Other copper
Top Layer:
  pour cut-out: 905,1619 867,1619 867,1753 980,1866 2786,1866 2786,1722 929,1721.9 929,1631
  pour cut-out: 1091,1684 1092,1683 1092,1489 1012,1489 984,1517 984,1679 1250,1679 1293,1722 2754,1722 2754,1764 1053.7,1764 1053.7,1749.7 985,1681
  pour cut-out: 2754,2651 2754,1176 2757,1173 3733,1173 3733,2651
Bottom Layer:
  pour cut-out: 2755,2651 2755,1173 3733,1173 3733,2651

## Silkscreen, mask and mechanical layers (free items; w line width, h text height)
Top Overlay:
  circle w10: c135,2516.39 r118.11
  circle w10: c135,134.61 r118.11
  circle w10: c3598,134.61 r118.11
  circle w10: c3598,2516.39 r118.11
  lines w7: 45,1956 45,2125 ; 280,1835 361,1835 361,2235 280,2235 ; 280,2030 360,2030 ; 2755,2651 2755,1173.1 3733,1173.1
  text "TouchKey" at 2873,2519 h70
  text "GND" at 28,2223 h32 r270
  text "3V3" at 297,2205 h50 r270
  text "LED2" at 2569,2113 h32
  text "LED1" at 2570,2013 h32
  text "5V" at 297,1988 h50 r270
  text "GND" at 27,1940 h32 r270
  text "SCL" at 514,1775 h32
  text "SDA" at 618,1775 h32
  text "VBAT" at 2143,1633 h32
  text "3V3" at 2491,1633 h32
  text "PD1" at 1199,1624 h32
  text "PD0" at 888,1620 h32
  text "PC13" at 2492,1535 h32
  text "PB9" at 2173,1532 h32
  text "PA1" at 1197,1527 h32
  text "PA0" at 886,1521 h32
  text "PB7" at 2493,1432 h32
  text "PB8" at 2173,1430 h32
  text "PA2" at 885,1423 h32
  text "PA3" at 1197,1423 h32
  text "PB5" at 2492,1334 h32
  text "PB6" at 2172,1333 h32
  text "PA4" at 885,1320 h32
  text "PA5" at 1197,1319 h32
  text "PB3" at 2493,1234 h32
  text "PB4" at 2174,1233 h32
  text "PA6" at 887,1222 h32
  text "PA7" at 1198,1222 h32
  text "+5V" at 198,1220 h32
  text "GND" at 457,1171 h32
  text "BOOT1" at 567,1170 h32
  text "PA14" at 2493,1133 h32
  text "PA15" at 2149,1132 h32
  text "PB0" at 885,1124 h32
  text "PB1" at 1197,1117 h32
  text "PA13" at 199,1116 h32
  text "NRST" at 2147,1045 h32
  text "GND" at 2491,1039 h32
  text "BOOT1" at 835,1030 h32
  text "PB10" at 1199,1028 h32
  text "PA14" at 201,1020 h32
  text "3V3" at 3239,978 h35
  text "3V3" at 3589,978 h35
  text "PA13" at 2150,930 h32
  text "PA12" at 2488,930 h32
  text "PB12" at 1198,925 h32
  text "NRST" at 199,923 h32
  text "PB11" at 873,922 h32
  text "GND" at 457,907 h32
  text "BOOT0" at 571,907 h32
  text "TXD" at 3240,876 h35
  text "T1_I" at 3590,876 h35
  text "PA11" at 2159,835 h32
  text "PA10" at 2488,833 h32
  text "PB14" at 1199,824 h32
  text "PB13" at 859,820 h32
  text "GND" at 199,818 h32
  text "RXD" at 3237,778 h35
  text "R1_O" at 3587,778 h35
  text "PA8" at 2488,736 h32
  text "PA9" at 2176,733 h32
  text "3V3" at 1202,725 h32
  text "PB15" at 862,721 h32
  text "GND" at 3239,680 h35
  text "GND" at 3589,680 h35
  text "CH32V103C-R1-1v1" at 1577,648 h35
  text "OFF" at 559,191 h32
  text "ON" at 408,190 h32
Mechanical 1:
  the board outline again, w7

## Text inside footprints (layer, text, board x,y; h text height)
D1: Top Overlay "+" at 735.99,231.92 h32 r180
D2: Top Overlay "+" at 2236.92,2009.01 h32 r90
D3: Top Overlay "+" at 2236.92,2124.01 h32 r90
P7: Top Overlay "MALE" at 2780.43,152.03 h30; Top Overlay "6" at 2588.5,301.14 h32; Top Overlay "5" at 3108.19,411.38 h32; Top Overlay "1" at 2553.07,411.38 h32; Top Overlay "9" at 3057.01,301.14 h32
P_HUSB0: Top Overlay "G" at 1350,375 h32; Top Overlay "V" at 1070,375 h32; Top Overlay "D+" at 1240,375 h32; Top Overlay "D-" at 1150,375 h32